# Altium PCB ESC_BOARD.PcbDoc (part 3 of 3)
Units mm, origin at the board's own origin, x right, y up, seen from the top; angles counter-clockwise.
Board outline 80 x 50 mm, 2 copper layers (Top Layer, Bottom Layer); 102 components, 86 nets, 400 pads, 339 vias.
Unrouted connection lines stored in the file: 55.
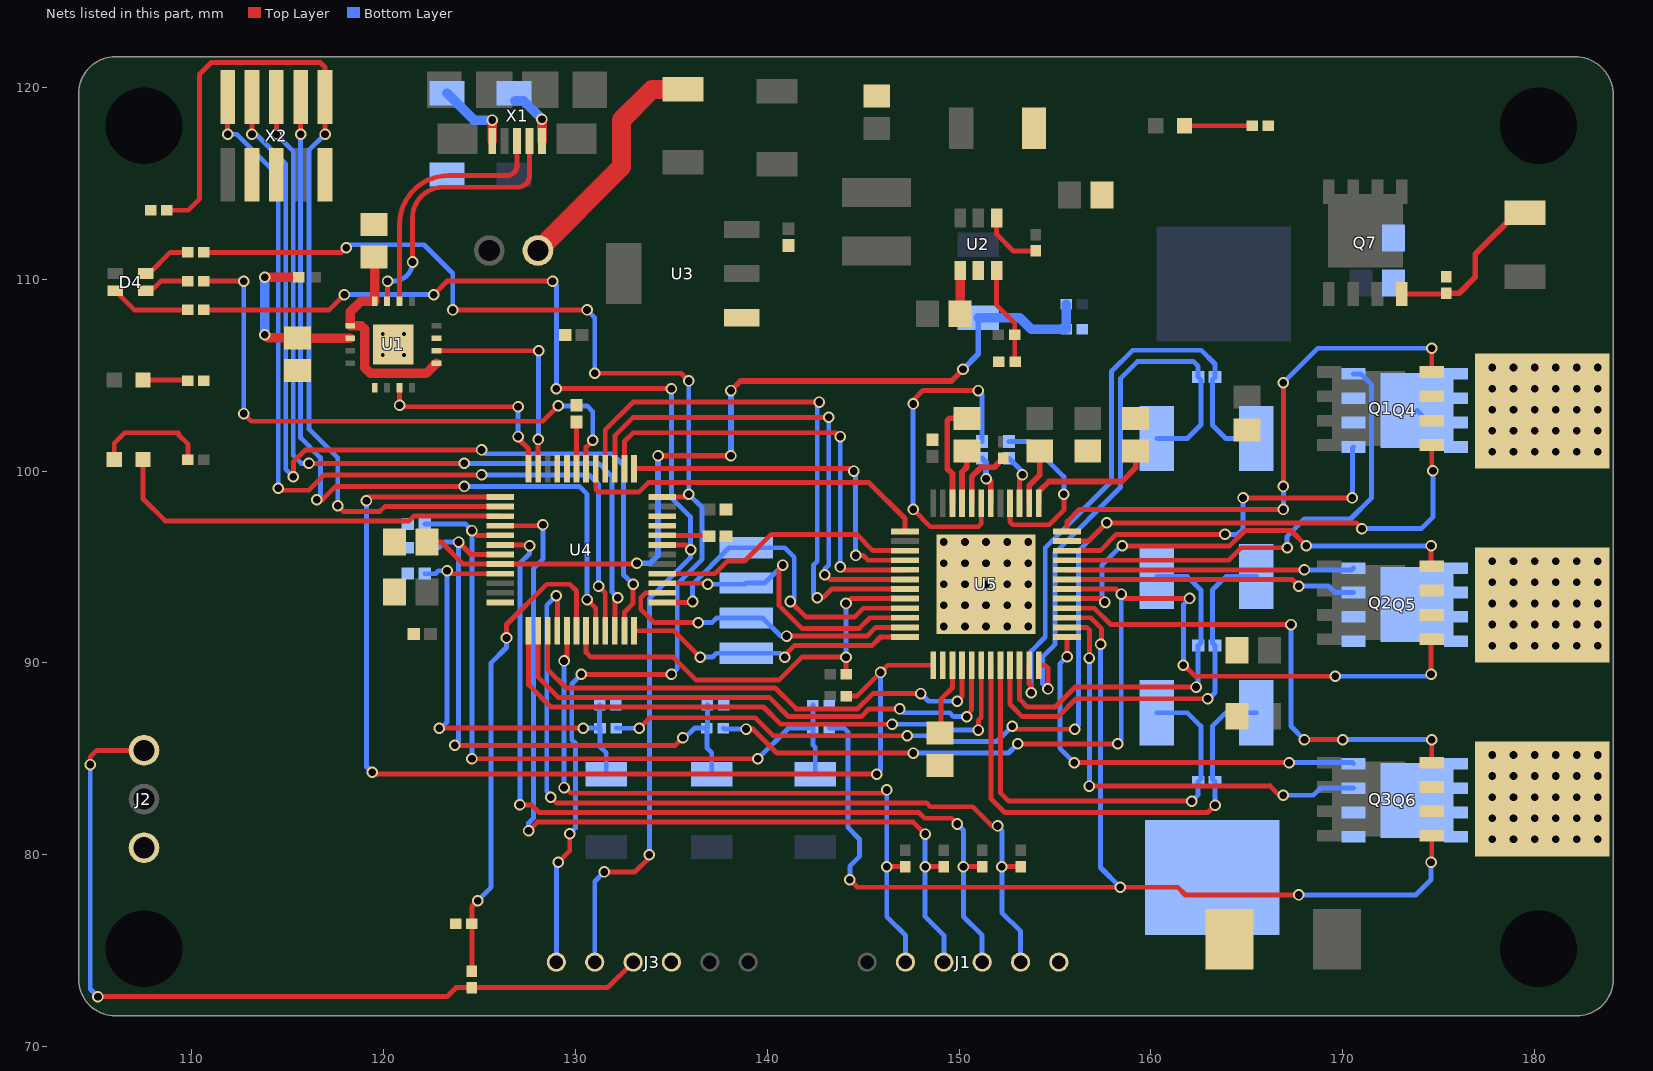
[diagram p2: the nets of this part, all layers, seen from the top]

## Via types
v1: diameter 0.6, hole 0.4, Top Layer to Bottom Layer, 310 vias
v2: diameter 0.7, hole 0.4, Top Layer to Bottom Layer, 25 vias
v3: diameter 0.5, hole 0.2, Top Layer to Bottom Layer, 4 vias

## Nets (pads, with @x,y where several pads share a name; then routed paths per layer and width w, separated by ;. In a path a pad name is that pad's centre, name@x,y a point inside that pad or via, vN(x,y) a via of type N, cw(c..) or ccw(c..) an arc to the next point about the centre after c; other vN are vias at no path point) (continued)
A_LS: U4.28 U5.3 | length 13.9
  Top Layer w0.254: U4.28@134.525,94.65 137.25,94.65 137.908,95.308 138.808,95.308 140.2,96.7 144.65,96.7 145.5,95.85 U5.3@147.175,95.85
ASENSE: C27.2 D8.1 R21.1 R24.2 U4.9 | length 24.6
  Top Layer w0.254: v1(122.9,86.6) v1(130.4,86.6) ; v1(123.3,94.8) 123.45,94.65 U4.9@126.075,94.65
  Bottom Layer w0.254: C27.2@122.14,94.65 122.7,94.65 122.85,94.8 v1(123.3,94.8) 123.3,86.9 123,86.6 v1(122.9,86.6) ; v1(130.4,86.6) R21.1@131.275,86.6 ; R24.2@131.25,87.8 131.25,86.625 R21.1@131.275,86.6 ; D8.1@131.6,84.2 131.6,85.315 131.275,85.64 R21.1@131.275,86.6
B_HS: U4.37 U5.4 | length 18.9
  Top Layer w0.254: U4.37@133.05,100.125 144.375,100.125 v1(144.5,100) 144.625,100 v1@144.5,100.125 ; v1(144.6,95.6) 145,95.6 145.25,95.35 U5.4@147.175,95.35
  Bottom Layer w0.254: v1(144.5,100) 144.6,99.9 v1(144.6,95.6)
B_LS: U4.38 U5.5 | length 23.2
  Top Layer w0.254: U4.38@132.55,100.125 132.55,101.55 133,102 143.6,102 v1(143.8,101.8) ; v1(143.8,95) 143.95,94.85 U5.5@147.175,94.85
  Bottom Layer w0.254: v1(143.8,95) v1(143.8,101.8)
BLUE_LED: J3.2 R12.2 U4.31 | length 65.4
  Top Layer w0.254: R12.2@110.625,108.4 117.15,108.4 v1(117.95,109.2) ; v1(122.6,109.2) 123.3,109.9 v1(128.8,109.9) ; v1(129,104.3) v1(135,104.3) ; v1(131.5,79.1) 133.1,79.1 133.85,79.85 v1(133.85,80) ; U4.31@134.525,96.15 135.75,96.15 v1(136,95.9)
  Bottom Layer w0.254: v1(117.95,109.2) v1(122.6,109.2) ; v1(128.8,109.9) 129,109.7 v1(129,104.3) ; J3.2@131,74.4 131,78.6 v1(131.5,79.1) ; v1(133.85,80) 133.85,93.35 136,95.5 v1(136,95.9) 136,97.6 135,98.6 v1(135,104.3)
BOOTSTRAP: C3.2 U2.1 | length 2.3
  Top Layer w0.5: C3.2@150.05,108.2 U2.1@150.05,110.45
BSENSE: C28.2 D9.1 R22.1 R25.2 U4.7 | length 32.2
  Top Layer w0.254: v1(123.7,85.7) 135.2,85.7 v1(135.6,86.1) ; v1(123.9,96.3) 124.55,95.65 U4.7@126.075,95.65
  Bottom Layer w0.254: C28.2@122.14,96 122.9,96 123.2,96.3 v1(123.9,96.3) 123.9,85.9 v1(123.7,85.7) ; v1(135.6,86.1) 135.7,86.1 136.2,86.6 R22.1@136.85,86.6 ; R25.2@136.875,87.8 136.875,86.625 R22.1@136.85,86.6 ; D9.1@137.1,84.2 137.1,85.315 136.85,85.565 R22.1@136.85,86.6
C_HS: U4.39 U5.6 | length 25.8
  Top Layer w0.254: U4.39@132.05,100.125 132.05,101.85 133,102.8 v1(143.2,102.8) ; v1(143,94.6) 143.25,94.35 U5.6@147.175,94.35
  Bottom Layer w0.254: v1(143,94.6) 143,94.9 143.2,95.1 v1(143.2,102.8)
C_LS: U4.40 U5.7 | length 29
  Top Layer w0.254: U4.40@131.55,100.125 131.55,102.15 133,103.6 v1(142.7,103.6) ; v1(142.6,93.4) 142.9,93.4 143.35,93.85 U5.7@147.175,93.85
  Bottom Layer w0.254: v1(142.6,93.4) 142.4,93.6 142.4,95.1 142.6,95.3 142.6,103.6 v1(142.7,103.6)
CSENSE: C29.2 D10.1 R23.1 R26.2 U4.5 | length 38.2
  Top Layer w0.254: v1(124.6,85) v1(139.5,85) ; v1(124.6,96.9) 124.85,96.65 U4.5@126.075,96.65
  Bottom Layer w0.254: C29.2@122.14,97.25 124.25,97.25 v1(124.6,96.9) v1(124.6,85) ; v1(139.5,85) 141.1,86.6 R23.1@142.375,86.6 ; R26.2@142.375,87.8 R23.1@142.375,86.6 ; D10.1@142.5,84.2 142.5,85.6 142.375,85.725 R23.1@142.375,86.6
CURRENT_SENSE_1: U4.13 U5.18 | length 30.7
  Top Layer w0.254: U4.13@127.55,91.675 127.55,88.85 128.7,87.7 139.8,87.7 140.7,86.8 v1(146.5,86.8) ; v1(151,86.5) 151,87 151.15,87.15 U5.18@151.15,89.875
  Bottom Layer w0.254: v1(146.5,86.8) 148.332,86.8 148.632,86.5 v1(151,86.5)
CURRENT_SENSE_2: U4.14 U5.17 | length 28.7
  Top Layer w0.254: U4.14@128.05,91.675 128.05,89.25 129.1,88.2 140.1,88.2 141.1,87.2 144.9,87.2 145.3,87.6 v1(146.9,87.6) ; v1(150.4,87.2) 150.4,87.3 150.65,87.55 U5.17@150.65,89.875
  Bottom Layer w0.254: v1(146.9,87.6) 147.1,87.4 149.5,87.4 149.7,87.2 v1(150.4,87.2)
CURRENT_SENSE_3: U4.15 U5.16 | length 26.7
  Top Layer w0.254: U4.15@128.55,91.675 128.55,89.65 129.5,88.7 140.4,88.7 141.5,87.6 144.7,87.6 145.5,88.4 v1(148,88.4) ; v1(149.9,88) 150.15,88.25 U5.16@150.15,89.875
  Bottom Layer w0.254: v1(148,88.4) 148.4,88 v1(149.9,88)
ERROR: D7.2 U4.3 | length 21.3
  Top Layer w0.254: D7.2@107.45,100.6 107.45,98.55 108.6,97.4 121.325,97.4 121.575,97.65 U4.3@126.075,97.65
FB: R7.1 R9.2 U2.3 | length 5.2
  Top Layer w0.254: U2.3@151.95,110.45 151.95,108.65 152.9,107.7 R7.1@152.9,107.1 152.9,105.725 R9.2@152.925,105.7
GATE_EN: U4.41 U5.1 | length 18.9
  Top Layer w0.254: U4.41@131.05,100.125 131.05,99.05 131.2,98.9 133.3,98.9 133.8,99.4 145.3,99.4 147.175,97.525 U5.1@147.175,96.85
GH_A: Q1.1 U5.36 | length 28.4
  Top Layer w0.254: U5.36@155.625,96.85 155.625,97.365 156.26,98 v1(166.9,98) ; v1(166.9,99.2) v1(166.9,104.6) ; Q1.1@174.64,105.17 v1(174.64,106.4)
  Bottom Layer w0.254: v1(166.9,98) v1(166.9,99.2) ; v1(166.9,104.6) 168.7,106.4 v1(174.64,106.4)
GH_B: Q2.1 U5.29 | length 23.9
  Top Layer w0.254: U5.29@155.625,93.35 157.49,93.35 157.67,93.17 v1(157.59,93.17) ; v1(158.5,96.1) 164.1,96.1 164.9,96.9 167.3,96.9 v1(168.1,96.1) ; v1(174.6,96.1) 174.6,95.28 174.36,95.04 Q2.1@174.64,95.04
  Bottom Layer w0.254: v1(157.59,93.17) 157.45,93.31 157.45,95.11 158.47,96.13 v1(158.5,96.1) ; v1(168.1,96.1) v1(174.6,96.1)
GH_C: Q3.1 U5.28 | length 26.2
  Top Layer w0.254: U5.28@155.625,92.85 157.05,92.85 157.9,92 v1(167.3,92) ; v1(168,86) v1(170,86) ; Q3.1@174.64,84.8 v1(174.64,86)
  Bottom Layer w0.254: v1(167.3,92) 167.3,86.7 v1(168,86) ; v1(170,86) v1(174.64,86)
GL_A: Q4.1 U5.33 | length 24.6
  Top Layer w0.254: U5.33@155.625,95.35 164.05,95.35 164.7,96 v1(167.1,96)
  Bottom Layer w0.254: v1(167.1,96) 167.1,96.6 168,97.5 170.4,97.5 171.5,98.6 171.5,104.5 170.93,105.07 Q4.1@170.56,105.07
GL_B: Q5.1 U5.32 | length 15
  Top Layer w0.254: U5.32@155.625,94.85 v1(168,94.85)
  Bottom Layer w0.254: v1(168,94.85) 170.47,94.85 Q5.1@170.56,94.94
GL_C: Q6.1 U5.25 | length 21.6
  Top Layer w0.254: v1(155.625,90.325) U5.25@155.625,91.35 ; v1(156,84.8) v1(167.2,84.8)
  Bottom Layer w0.254: v1(155.625,90.325) 155.25,89.95 155.25,85.55 v1(156,84.8) ; v1(167.2,84.8) 170.5,84.8 Q6.1@170.56,84.74
GND: C1.1 C2.1 C4.1 C5.1 C6.1 C7.1 C8.1 C9.1 C10.1 C11.2 C12.2 C15.1 C17.1 C18.1 C19.1 C20.1 C22.1 C23.1 C24.1 C25.1 C26.1 C27.1 C28.1 C29.1 C32.1 C33.1 C34.1 D2.1 D13.2 FB2.2 J1.6 J2.3 J3.4 pad.1@163.2,78.8 R8.2 R9.1 R16.1 R18.1 R19.1 R20.1 R24.1 R25.1 R26.1 R28.1 R29.2 R30.1 R32.1 U1.3 U1.13 U1.17 U2.2 U3.1 U4.12 U4.33 U4.34 U4.44 U4.45 U5.14 U5.20 U5.22 U5.24 U5.49 X2.3 X2.5 X2.9 | length 72.6
  Top Layer w0.254: U5.20@152.15,89.875 152.15,83.23 152.59,82.79 v1(162.13,82.79) ; U5.22@153.15,89.875 153.15,88.1 153.55,87.7 155,87.7 156.04,88.74 v1(162.35,88.74) ; U5.24@154.15,89.875 154.485,89.875 154.63,89.73 v1(154.63,88.64)
  Bottom Layer w0.254: v1(154.63,88.64) 154.35,88.92 154.35,90.33 155,90.98 155,95.75 158.42,99.17 158.42,104.84 159.3,105.72 162.2,105.72 162.46,105.46 C23.1@162.46,104.9 162.6,104.76 162.6,102.4 161.9,101.7 R18.1@160.3,101.7 ; R20.1@160.3,87.4 161.9,87.4 162.6,86.7 162.6,83.94 C25.1@162.46,83.8 162.46,83.12 v1(162.13,82.79) ; R19.1@160.3,94.5 161.9,94.5 162.6,93.8 C24.1@162.6,91.14 ; v1(162.35,88.74) 162.46,88.85 C24.1@162.46,90.9 C24.1@162.6,91.04
  other v2: 149.2,91.9 150.3,91.9 151.4,91.9 152.5,91.9 153.6,91.9 149.2,93 150.3,93 151.4,93 152.5,93 153.6,93 149.2,94.1 150.3,94.1 151.4,94.1 152.5,94.1 153.6,94.1 149.2,95.2 150.3,95.2 151.4,95.2 152.5,95.2 153.6,95.2 149.2,96.3 150.3,96.3 151.4,96.3 152.5,96.3 153.6,96.3
  other v3: 119.95,106.05 121.05,106.05 119.95,107.15 121.05,107.15
GREEN_LED: J3.1 R10.2 U4.36 | length 69.3
  Top Layer w0.254: R10.2@110.625,111.4 117.8,111.4 v1(118.05,111.65) ; v1(123.6,108.4) v1(130.6,108.4) ; v1(129.1,79.6) 129.7,80.2 v1(129.7,81.1) ; v1(130.3,89.4) v1(135,89.4) ; v1(131,105.1) 135.5,105.1 v1(135.9,104.7) ; U4.36@134.525,98.65 135.75,98.65 v1(135.9,98.8)
  Bottom Layer w0.254: v1(118.05,111.65) 118.2,111.8 122.1,111.8 123.6,110.3 v1(123.6,108.4) ; J3.1@129,74.4 129,79.5 v1(129.1,79.6) ; v1(129.7,81.1) 130,81.4 130,85.8 129.8,86 129.8,88.9 v1(130.3,89.4) ; v1(130.6,108.4) 131,108 v1(131,105.1) ; v1(135,89.4) 135.3,89.7 135.3,94.1 136.6,95.4 136.6,98.1 v1(135.9,98.8) v1(135.9,104.7)
HALL_1: J1.3 R2.1 U4.4 | length 47.7
  Top Layer w0.254: U4.4@126.075,97.15 128.25,97.15 v1(128.3,97.2) ; v1(127.55,81.25) 128,81.7 147.6,81.7 v1(148.225,81.075) ; v1(148.225,79.375) R2.1@149.2,79.375
  Bottom Layer w0.254: v1(127.55,81.25) 127.55,81.65 127.8,81.9 127.8,94.9 128.3,95.4 v1(128.3,97.2) ; v1(148.225,81.075) v1(148.225,79.375) 148.225,76.775 149.2,75.8 J1.3@149.2,74.4
HALL_2: J1.4 R3.1 U4.6 | length 47.2
  Top Layer w0.254: U4.6@126.075,96.15 127.55,96.15 v1(127.6,96.1) ; v1(127.1,82.6) 127.7,82.6 128.1,82.2 147.9,82.2 148.2,81.9 149.6,81.9 v1(149.9,81.6) ; v1(150.225,79.375) R3.1@151.2,79.375
  Bottom Layer w0.254: v1(127.1,82.6) 127.1,95.2 127.6,95.7 v1(127.6,96.1) ; v1(149.9,81.6) 150.225,81.275 v1(150.225,79.375) 150.225,76.775 151.2,75.8 J1.4@151.2,74.4
HALL_3: J1.5 R4.1 U4.16 | length 45.1
  Top Layer w0.254: v1(128.7,83) 129,82.7 148.3,82.7 148.5,82.5 150.7,82.5 151.7,81.5 v1(152,81.5) ; v1(129,93.5) 129.05,93.45 U4.16@129.05,91.675 ; v1(152.225,79.375) R4.1@153.2,79.375
  Bottom Layer w0.254: v1@128.75,83.05 128.5,83.3 128.5,93 v1(129,93.5) ; v1(152,81.5) 152.225,81.275 v1(152.225,79.375) 152.225,76.975 153.2,76 J1.5@153.2,74.4
MOTOR_TEMP: J1.2 R1.1 U4.17 | length 35.6
  Top Layer w0.254: v1(129.4,83.5) 129.8,83.2 146.05,83.2 v1(146.225,83.375) ; v1(129.4,90.1) 129.55,90.15 U4.17@129.55,91.675 ; v1(146.225,79.375) R1.1@147.2,79.375
  Bottom Layer w0.254: v1(129.4,83.5) v1(129.4,90.1) ; v1(146.225,83.375) v1(146.225,79.375) 146.225,76.775 147.2,75.8 J1.2@147.2,74.4
NetC11_1: C11.1 U4.32 | length 2.4
  Top Layer w0.254: U4.32@134.525,96.65 C11.1@136.96,96.65
NetC12_1: C12.1 U4.43 | length 2.4
  Top Layer w0.254: U4.43@130.05,100.125 C12.1@130.05,102.56
NetC13_1: C13.1 U5.43 | length 17.1
  Top Layer w0.254: v1(147.6,98) 148.5,97.1 151,97.1 151.15,97.25 U5.43@151.15,98.325 ; v1(147.6,103.5) 147.6,103.7 148.1,104.2 v1(151,104.2)
  Bottom Layer w0.254: v1(147.6,98) v1(147.6,103.5) ; v1(151,104.2) 151.2,104 C13.1@151.2,101.54
NetC13_2: C13.2 U5.42 | length 2.3
  Top Layer w0.3: U5.42@151.65,98.325 v1@151.65,99.45
  Bottom Layer w0.3: C13.2@151.2,100.66 151.4,100.46 v1(151.4,99.6)
NetC14_1: C14.1 U5.40 | length 9.5
  Top Layer w0.254: U5.40@152.65,98.325 152.65,97.35 152.8,97.2 154.7,97.2 155.46,97.96 v1(155.46,98.79)
  Bottom Layer w0.254: C14.1@152.6,101.54 153.63,101.54 155.46,99.71 v1(155.46,98.79)
NetC14_2: C14.2 U5.39 | length 2.7
  Top Layer w0.254: U5.39@153.15,98.325 153.15,99.65 v1(153.3,99.8)
  Bottom Layer w0.254: C14.2@152.6,100.66 153.3,99.96 v1(153.3,99.8)
NetC16_1: C16.1 U5.45 | length 2.8
  Top Layer w0.3: U5.45@150.15,98.325 150.15,99.95 150.4,100.2 C16.1@150.4,101.05
NetC16_2: C16.2 U5.46 | length 5.5
  Top Layer w0.3: U5.46@149.65,98.325 149.65,99.856 149.384,100.122 149.384,102.634 149.5,102.75 C16.2@150.4,102.75
NetC21_1: C21.1 U5.38 | length 3
  Top Layer w0.3: U5.38@153.65,98.325 153.65,99.25 154.2,99.8 C21.1@154.2,101.05
NetC22_2: C22.2 U5.37 | length 7
  Top Layer w0.3: U5.37@154.15,98.325 154.15,98.93 154.68,99.46 158.482,99.46 159.2,100.178 C22.2@159.2,101.05
NetC26_2: C26.2 U5.15 | length 3.8
  Top Layer w0.254: C26.2@149.05,86.35 149.05,88.1 149.65,88.7 U5.15@149.65,89.875
NetD1_2: D1.2 R29.1 | length 3.5
  Top Layer w0.254: D1.2@161.75,118 R29.1@165.275,118
NetD3_2: D3.2 R8.1 | length 2.3
  Top Layer w0.254: D3.2@107.45,104.75 109.725,104.75 R8.1@109.775,104.7
NetD4_1: D4.1 R10.1 | length 2.5
  Top Layer w0.254: D4.1@107.775,110.3 108.875,111.4 R10.1@109.775,111.4
NetD4_2: D4.2 R11.1 | length 2.1
  Top Layer w0.254: D4.2@107.875,109.4 108.375,109.9 R11.1@109.775,109.9
NetD4_3: D4.3 R12.1 | length 4.2
  Top Layer w0.254: D4.3@106,109.4 107,108.4 R12.1@109.775,108.4
NetD6_1: D6.1 JP1.2 | length 12.5
  Top Layer w1: JP1.2@128.04,111.5 132.4,115.86 132.4,118.3 134,119.9 D6.1@135.6,119.9
NetD7_1: D7.1 R31.1 | length 6
  Top Layer w0.254: D7.1@105.95,100.6 105.95,101.45 106.5,102 109.3,102 109.3,101.9 109.8,101.4 R31.1@109.8,100.6
NetD12_2: D12.2 Q7.1 R32.2 | length 8.9
  Top Layer w0.254: Q7.1@173.078,109.229 175.446,109.229 R32.2@175.475,109.2
  Top Layer w0.3: R32.2@175.4,109.275 176.075,109.275 176.9,110.1 176.9,111.3 179.065,113.465 D12.2@179.5,113.465
NetR17_1: R17.1 U5.44 | length 3.4
  Top Layer w0.3: U5.44@150.65,98.325 150.65,99.7 151.15,100.2 151.825,100.2 R17.1@152.3,100.675
nFAULT: R14.1 U4.19 U5.8 | length 22.7
  Top Layer w0.254: U4.19@130.55,91.675 130.55,90.55 130.8,90.3 135.1,90.3 136.3,89.1 140.6,89.1 141.8,90.3 v1(144.1,90.3) R14.1@144.1,89.4 ; v1(144.1,93.1) 144.35,93.35 U5.8@147.175,93.35
  Bottom Layer w0.254: v1(144.1,90.3) v1(144.1,93.1)
nRESET: R30.2 U4.2 X2.10 | length 47.9
  Top Layer w0.254: R30.2@108.7,113.6 109.8,113.6 110.4,114.2 110.4,120.7 111,121.3 116.7,121.3 116.94,121.06 X2.10@116.94,119.5 v1(116.94,117.56) ; v1(117.6,98.2) 117.9,97.9 119.8,97.9 120.05,98.15 U4.2@126.075,98.15
  Bottom Layer w0.254: v1(116.94,117.56) 116.1,116.72 116.1,102.2 117.6,100.7 v1(117.6,98.2)
POWER_GOOD: R13.1 U4.1 U5.13 | length 58.4
  Top Layer w0.254: v1(119.1,98.45) 119.1,98.6 119.15,98.65 U4.1@126.075,98.65 ; v1(119.4,84.3) 119.5,84.2 v1(145.7,84.2) ; R13.1@144.125,88.1 144.295,88.27 144.67,88.27 146.275,89.875 U5.13@148.65,89.875
  Bottom Layer w0.254: v1(119.1,98.45) 119.1,84.6 v1(119.4,84.3) ; v1(145.7,84.2) 145.9,84.4 v1(145.9,89.5)
RED_LED: R11.2 U4.42 | length 30.9
  Top Layer w0.254: R11.2@110.625,109.9 v1(112.7,109.9) ; v1(112.7,103) 113.1,102.6 128.3,102.6 v1(129.1,103.4) ; U4.42@130.55,100.125 130.55,101.25 v1(130.9,101.6)
  Bottom Layer w0.254: v1(112.7,103) v1(112.7,109.9) ; v1(129.1,103.4) 130.6,103.4 130.9,103.1 v1(130.9,101.6)
SH_A: pad.1@180.4,103.138 Q1.3 Q4.2 R21.2 U5.35 | length 60.6
  Top Layer w0.254: v1(133.32,86.59) 133.87,87.14 139.36,87.14 140.3,86.2 v1(147.3,86.2) ; v1(152.76,86.7) 152.92,86.54 v1(156.03,86.54) ; U5.35@155.625,96.35 156.74,96.35 v1(157.69,97.3) 170.7,97.3 v1(171,97) ; Q1.3@174.64,101.36 174.64,100.177 174.7,100.117 v1(174.7,100.009)
  Bottom Layer w0.254: R21.2@132.125,86.6 132.135,86.59 v1(133.32,86.59) ; v1(147.3,86.2) 148.3,86.2 148.6,85.9 151.96,85.9 v1(152.76,86.7) ; v1(156.03,86.54) 156.23,86.74 156.23,95.84 v1(157.69,97.3) ; v1(171,97) 174.1,97 174.7,97.6 v1(174.7,100.009) ; Q4.2@173.862,103.165 Q4.2@174.2,102.827
  other v1: 177.8,101 178.9,101 180,101 181.1,101 182.2,101 183.3,101 177.8,102.1 178.9,102.1 180,102.1 181.1,102.1 182.2,102.1 183.3,102.1 177.8,103.2 178.9,103.2 180,103.2 181.1,103.2 182.2,103.2 183.3,103.2 177.8,104.3 178.9,104.3 180,104.3 181.1,104.3 182.2,104.3 183.3,104.3 177.8,105.4 178.9,105.4 180,105.4 181.1,105.4 182.2,105.4 183.3,105.4
SH_B: pad.2@180.4,93.008 Q2.3 Q5.2 R22.2 U5.30 | length 54.4
  Top Layer w0.254: v1(138.89,86.55) 139.25,86.55 140.5,85.3 v1(147.6,85.3) ; v1(153.05,85.78) v1(158.27,85.78) ; U5.30@155.625,93.85 158.17,93.85 158.66,93.36 v1(162.01,93.36) ; v1(161.69,89.88) 161.72,89.88 162.3,89.3 v1(169.6,89.3) ; v1(174.6,89.4) 174.6,91.19 Q2.3@174.64,91.23
  Bottom Layer w0.254: R22.2@137.7,86.6 137.75,86.55 v1(138.89,86.55) ; v1(147.6,85.3) 152.57,85.3 v1(153.05,85.78) ; v1(158.27,85.78) 158.45,85.96 v1(158.45,93.59) ; v1(161.69,89.88) 161.69,93.04 v1(162.01,93.36) ; v1(169.6,89.3) 174.5,89.3 v1(174.6,89.4)
  other v1: 177.8,90.9 178.9,90.9 180,90.9 181.1,90.9 182.2,90.9 183.3,90.9 177.8,92 178.9,92 180,92 181.1,92 182.2,92 183.3,92 177.8,93.1 178.9,93.1 180,93.1 181.1,93.1 182.2,93.1 183.3,93.1 177.8,94.2 178.9,94.2 180,94.2 181.1,94.2 182.2,94.2 183.3,94.2 177.8,95.3 178.9,95.3 180,95.3 181.1,95.3 182.2,95.3 183.3,95.3
SH_C: pad.3 Q3.3 Q6.2 R23.2 U5.27 | length 58.8
  Top Layer w0.254: v1(144.3,78.7) 144.7,78.3 v1(158.4,78.3) 161.4,78.3 161.8,77.9 v1(167.7,77.9) ; U5.27@155.625,92.35 156.86,92.35 157.43,91.78 157.43,91.03 v1(157.37,90.97) ; Q3.3@174.27,83.53 Q3.3@174.64,83.53 ; v1(174.6,79.6) 174.6,79.8 174.64,79.84 Q3.3@174.64,80.99
  Bottom Layer w0.254: R23.2@143.225,86.6 144,86.6 144.2,86.4 144.2,81.42 144.8,80.82 144.8,79.9 144.3,79.4 v1(144.3,78.7) ; v1(157.37,90.97) 157.37,79.33 v1(158.4,78.3) ; v1(167.7,77.9) 173.8,77.9 174.6,78.7 v1(174.6,79.6)
  other v1: 177.8,80.8 178.9,80.8 180,80.8 181.1,80.8 182.2,80.8 183.3,80.8 177.8,81.9 178.9,81.9 180,81.9 181.1,81.9 182.2,81.9 183.3,81.9 177.8,83 178.9,83 180,83 181.1,83 182.2,83 183.3,83 177.8,84.1 178.9,84.1 180,84.1 181.1,84.1 182.2,84.1 183.3,84.1 177.8,85.2 178.9,85.2 180,85.2 181.1,85.2 182.2,85.2 183.3,85.2
SHDN_N: R6.1 U2.4 | length 3.3
  Top Layer w0.254: U2.4@151.95,113.2 151.95,112.35 152.825,111.475 R6.1@154,111.475
SL_A: C23.2 Q4.3 R18.2 U5.23 U5.34 | length 51.6
  Top Layer w0.254: U5.23@153.65,89.875 153.65,88.92 153.75,88.82 v1(153.75,88.441) ; U5.34@155.625,95.85 157.35,95.85 158.2,96.7 v1(163.859,96.7) ; v1(164.8,98.6) v1(170.5,98.6)
  Bottom Layer w0.254: v1(153.75,88.441) 153.75,90.61 154.49,91.35 154.49,96.01 157.94,99.46 157.94,105.2 159.04,106.3 162.62,106.3 163.34,105.58 C23.2@163.34,104.9 163.2,104.76 163.2,102.4 163.9,101.7 R18.2@165.5,101.7 ; v1(163.859,96.7) 164.5,96.7 164.8,97 v1(164.8,98.6) ; v1(170.5,98.6) 170.5,101.2 Q4.3@170.56,101.26
SL_B: C24.2 Q5.3 R19.2 U5.21 U5.31 | length 36.8
  Top Layer w0.254: U5.21@152.65,89.875 152.65,87.84 153.29,87.2 155.16,87.2 156.09,88.13 v1(162.95,88.13) ; U5.31@155.625,94.35 167.35,94.35 v1(167.7,94)
  Bottom Layer w0.254: v1(162.95,88.13) 162.95,88.05 163.34,88.44 C24.2@163.34,90.9 163.2,91.04 163.2,93.8 163.9,94.5 R19.2@165.5,94.5 ; v1(167.7,94) 169.271,94 169.601,93.67 Q5.3@170.56,93.67
SL_C: C25.2 Q6.3 R20.2 U5.19 U5.26 | length 49.6
  Top Layer w0.254: U5.19@151.65,89.875 151.65,82.93 152.38,82.2 162.96,82.2 v1(163.34,82.58) ; U5.26@155.625,91.85 156.65,91.85 156.79,91.71 v1(156.79,90.25) ; v1(156.79,83.58) 166.18,83.58 166.2,83.6 166.8,83 v1(166.9,83.1)
  Bottom Layer w0.254: v1@156.79,83.42 v1(156.79,83.58) v1(156.79,90.25) ; v1(163.34,82.58) C25.2@163.34,83.8 163.2,83.94 163.2,86.7 163.9,87.4 R20.2@165.5,87.4 ; v1(166.9,83.1) 168.47,83.1 168.84,83.47 Q6.3@170.56,83.47
SPI_CS_N: CS.1 U4.25 U5.9 | length 17.6
  Top Layer w0.254: U4.25@134.525,93.15 136.05,93.15 v1(136.1,93.2) ; v1(141.2,93.2) 142,92.4 144.55,92.4 145,92.85 U5.9@147.175,92.85
  Bottom Layer w0.254: v1(136.1,93.2) 136.1,94.1 138,96 CS.1@138.9,96 140.9,96 141.4,95.5 v1@141.4,93.2
SPI_MISO: SCK.1 U4.26 U5.11 | length 16.6
  Top Layer w0.254: U4.26@134.525,93.65 133.65,93.65 133.4,93.4 133.4,92.8 134.1,92.1 v1(136.4,92.1) ; v1(141,91.4) 145.2,91.4 145.65,91.85 U5.11@147.175,91.85
  Bottom Layer w0.254: v1(136.4,92.1) 137.104,92.1 137.338,92.333 SCK.1@138.9,92.333 139.767,92.333 140.7,91.4 v1(141,91.4)
SPI_MOSI: MOSI.1 U4.27 U5.10 | length 16.2
  Top Layer w0.254: U4.27@134.525,94.15 136.85,94.15 v1(136.9,94.1) ; v1(140.8,95.1) 140.6,94.9 140.6,93 141.8,91.8 144.8,91.8 145.35,92.35 U5.10@147.175,92.35
  Bottom Layer w0.254: v1(136.9,94.1) 138.833,94.1 MOSI.1@138.9,94.167 139.867,94.167 v1(140.8,95.1)
SPI_SCK: MISO.1 U4.24 U5.12 | length 15.4
  Top Layer w0.254: U4.24@133.05,91.675 135.125,91.675 v1(136.5,90.3) ; v1(140.9,90.3) 140.9,90.4 141.4,90.9 145.45,90.9 145.9,91.35 U5.12@147.175,91.35
  Bottom Layer w0.254: v1(136.5,90.3) 137.138,90.3 137.338,90.5 MISO.1@138.9,90.5 140.7,90.5 v1(140.9,90.3)
TCK: U4.23 X2.4 | length 48.4
  Top Layer w0.254: v1(113.13,117.56) X2.4@113.13,119.5 ; v1(115.29,99.7) 115.29,100.49 115.9,101.1 v1(125.1,101.1) ; U4.23@132.55,91.675 132.55,92.65 133,93.1 v1(133,94.1)
  Bottom Layer w0.254: v1(113.13,117.56) 113.34,117.56 114.89,116.01 114.89,100.1 v1(115.29,99.7) ; v1(125.1,101.1) 125.3,100.9 131.9,100.9 132.5,100.3 132.5,94.6 v1(133,94.1)
TDI: U4.20 X2.8 | length 43.4
  Top Layer w0.254: v1(115.67,117.56) X2.8@115.67,119.5 ; v1(116.5,98.5) 116.8,98.5 117.5,99.2 v1(124.2,99.2) ; v1(130.6,93.3) 131.05,92.85 U4.20@131.05,91.675
  Bottom Layer w0.254: v1(115.67,117.56) 115.67,101.73 116.7,100.7 116.7,98.7 v1(116.5,98.5) ; v1(124.2,99.2) 130.2,99.2 130.6,98.8 v1(130.6,93.3)
TDO: U4.22 X2.6 | length 44.3
  Top Layer w0.254: v1(114.4,117.56) X2.6@114.4,119.5 ; v1(116.1,100.4) v1(124.2,100.4) ; U4.22@132.05,91.675 132.05,93.25 v1(132.2,93.4)
  Bottom Layer w0.254: v1(114.4,117.56) 115.28,116.68 115.28,100.82 115.7,100.4 v1(116.1,100.4) ; v1(124.2,100.4) 131.2,100.4 131.9,99.7 131.9,93.7 v1(132.2,93.4)
THROTTLE_3V3: R15.1 R16.2 U4.18 | length 25.6
  Top Layer w0.254: R15.1@124.6,73.925 R16.2@124.6,76.4 124.6,77.3 v1(124.9,77.6) ; v1(126.4,91.3) 126.4,92 128.5,94.1 129.7,94.1 130.05,93.75 U4.18@130.05,91.675
  Bottom Layer w0.254: v1(124.9,77.6) 125.6,78.3 125.6,90 126.4,90.8 v1(126.4,91.3)
THROTTLE_5V: J2.1 J3.3 R15.2 | length 44.3
  Top Layer w0.254: v1(104.7,84.7) 104.7,85.1 105.04,85.44 J2.1@107.5,85.44 ; v1(105.1,72.6) 123.3,72.6 123.775,73.075 R15.2@124.6,73.075 131.675,73.075 J3.3@133,74.4
  Bottom Layer w0.254: v1(104.7,84.7) 104.7,73 v1(105.1,72.6)
TMS: U4.21 X2.2 | length 46.9
  Top Layer w0.254: v1(111.86,117.56) X2.2@111.86,119.5 ; v1(114.5,99.1) 114.5,99 116.1,99 116.9,99.8 v1(125.1,99.8) ; v1(131.2,94) 131.55,93.65 U4.21@131.55,91.675
  Bottom Layer w0.254: v1(111.86,117.56) 112.34,117.56 114.5,115.4 v1(114.5,99.1) ; v1(125.1,99.8) 130.7,99.8 131.2,99.3 v1(131.2,94)
UART_MCU_RX: U1.15 U4.48 | length 10.6
  Top Layer w0.254: U1.15@120.825,104.35 v1(120.825,103.425) 120.9,103.35 v1(127,103.35) ; v1(127,101.8) 127,101.7 127.55,101.15 U4.48@127.55,100.125
  Bottom Layer w0.254: v1(127,101.8) v1(127,103.35)
UART_MCU_TX: U1.2 U4.47 | length 11.5
  Top Layer w0.254: U1.2@122.75,106.275 v1(128.075,106.275) ; U4.47@128.05,100.125 v1(128.05,101.65)
  Bottom Layer w0.254: v1(128.05,101.65) 128.075,101.675 v1(128.075,106.275)
USBDM: U1.7 X1.2 | length 14.4
  Top Layer w0.254: U1.7@120.175,108.85 ccw(c120.175,108.875) 120.2,108.875 v1(120.2,109.9) ; v1(121.5,110.9) 121.5,113.2 cw(c123.1,113.2) 123.1,114.8 127,114.8 ccw(c127,115.4) 127.6,115.4 X1.2@127.6,117.2
  Bottom Layer w0.254: v1(120.2,109.9) 120.5,109.9 ccw(c120.5,110.9) v1(121.5,110.9)
USBDP: U1.6 X1.3 | length 13.1
  Top Layer w0.254: U1.6@120.825,108.85 120.825,112.86 cw(c123.365,112.86) 123.365,115.4 126.4,115.4 ccw(c126.4,115.95) 126.95,115.95 X1.3@126.95,117.2
USBVDD: FB1.1 X1.1 | length 3
  Top Layer w0.5: X1.1@128.25,117.2 v1(128.25,118.35)
  Bottom Layer w0.5: FB1.1@126.82,119.3 127.3,119.3 v1(128.25,118.35)
USBVSS: FB2.1 X1.5 | length 4
  Top Layer w0.5: X1.5@125.65,117.2 v1(125.65,118.3)
  Bottom Layer w0.5: FB2.1@123.3,119.7 124.7,118.3 v1(125.65,118.3)
VBUSSENSE: C34.2 D11.1 R27.1 R28.2 U4.8 | length 46.7
  Top Layer w0.254: C34.2@122.25,96.3 123,96.3 124.15,95.15 U4.8@126.075,95.15 133.15,95.15 v1(133.2,95.2)
  Top Layer w0.3: v1(134.3,100.8) v1(138.1,100.8) ; v1(138.1,104.2) 138.6,104.7 149.6,104.7 v1(150.2,105.3)
  Bottom Layer w0.3: v1@133.4,95.2 133.9,95.2 134.3,95.6 v1(134.3,100.8) ; v1(138.1,100.8) 138.1,104.1 v1@138.2,104.2 ; v1(150.2,105.3) 151,106.1 D11.1@151,108
  Bottom Layer w0.5: D11.1@151,108 153.15,108 153.75,107.4 R28.2@155.575,107.4 R27.1@155.575,108.7
VCC_5V: C1.2 R5.2 U1.10 | length 9.3
  Top Layer w0.254: C1.2@115.5,106.95 C1.2@115.525,106.925
  Top Layer w0.5: v1(113.8,107.1) 113.95,106.95 C1.2@115.5,106.95 ; v1(113.8,110.1) R5.2@115.575,110.1 ; C1.2@115.525,106.925 U1.10@118.25,106.925
  Bottom Layer w0.5: v1(113.8,107.1) v1(113.8,110.1)
VCCIO: C2.2 U1.1 U1.8 U1.9 | length 11.5
  Top Layer w0.254: C2.2@119.5,111.15 C2.2@119.525,111.125
  Top Layer w0.5: C2.2@119.525,111.125 U1.8@119.525,108.85 118.8,108.85 118.25,108.3 U1.9@118.25,107.575 118.825,107.575 119,107.4 119,105.4 119.3,105.1 122.225,105.1 U1.1@122.75,105.625
pads on no net: U1.4 U1.5 U1.11 U1.12 U1.14 U1.16 U4.30 U4.46 U5.47 X1. X1.4 X2.7

## Polygon pours and split planes (outlines as drawn)
+VBUS on Top Layer "VBUS" (solid, remove dead copper, pour order 6): 167.8,73.7 168.3,73.2 171.2,73.2 171.9,73.9 171.9,78.8 172.2,79.1 173.6,80.5 173.6,106.5 172.4,107.7 172.4,110 168.8,110 168.309,109.509 167.8,109
+5V on Top Layer "5V" (solid, remove dead copper, pour order 4): 134.3,117.4 133.9,117 133.9,113.1 134.7,112.3 141.1,112.3 141.275,112.475 142.375,112.475 142.5,112.6 142.5,116.8 141.9,117.4
+5V_BUCK on Top Layer "5V_BUCK" (solid, remove dead copper, pour order 2): 141.5,118.2 143,116.7 143,113.841 143.541,113.3 147.45,113.3 148.05,113.9 148,113.95 148,118.2 147.7,118.5 147.4,118.8 144,118.8 142.3,120.5 141.7,121.1 139.05,121.1 138.53,120.58 138.53,118.72 139.05,118.2
5V_SW on Top Layer "GND" (solid, remove dead copper, pour order 0): 144.069,106.4 148.9,106.4 149.2,106.7 149.2,111.5 150.1,111.5 150.5,111.9 150.5,115.4 151.7,116.6 151.7,119.1 151.3,119.5 148.9,119.5 148.2,118.8 148.2,113.8 147.5,113.1 143.9,113.1 143.3,112.5 143.3,107.056
SH_A on Top Layer "SH_A" (solid, remove dead copper, pour order 16): 174.12,104.58 173.72,104.18 173.72,100.59 174.16,100.15 178.11,100.15 178.63,100.67 178.63,104.17 178.22,104.58
SH_B on Top Layer "SH_B" (solid, remove dead copper, pour order 18): 174.09,94.46 173.69,94.06 173.69,90.47 174.13,90.03 178.08,90.03 178.6,90.55 178.6,94.05 178.19,94.46
SH_C on Top Layer "SH_C" (solid, remove dead copper, pour order 20): 173.953,84.25 173.76,84.057 173.76,80.213 174.073,79.9 178.023,79.9 178.543,80.42 178.543,83.92 178.213,84.25
+VIN on Top Layer "V_IN" (solid, remove dead copper, pour order 22): 161.4,112.6 160.7,111.9 160.7,107.6 161.3,107 166.6,107 167.3,107.7 167.3,109.1 168.6,110.4 173.3,110.4 173.8,110.9 173.8,115.15 173.35,115.6 173.329,115.579 168.5,115.579 168.125,115.204 168.125,113.725 167,112.6
+VBUS on Top Layer "VBUS CAPS" (solid, remove dead copper, pour order 34): 158.9,106.6 158.2,107.3 158.2,111.5 156.6,113.1 156.6,115.3 156.4,115.5 151.2,115.5 150.6,114.9 150.6,112.725 151.425,111.9 155.2,111.9 156,111.1 156,107.1 151.85,102.95 151.85,101.375 152.125,101.1 152.8,101.1 153.25,101.55 153.25,101.7 153.3,101.7 153.5,101.9 157.4,101.9 158.2,102.7 158.2,103.9 159.4,105.1 163.75,105.1 163.85,105 163.85,103.25 163.984,103.116 163.984,103.022 165.608,103.022 165.715,102.915 166.2,103.4 166.2,105 166.3,105.1 168.3,105.1 168.8,105.6 168.8,106.5 168.6,106.6
GND on Bottom Layer "POWER_GND" (solid, remove dead copper, pour order 14): 161.6,85.6 161.6,82.8 162.4,82 165.7,82 167.4,80.3 167.4,76.4 166.5,75.5 160.2,75.5 159.1,76.6 159.1,82.5 159.1,85.6 159.1,103.559 159.541,104 161.132,104 161.6,103.532
SL_B on Bottom Layer "SL_B" (solid, remove dead copper, pour order 12): 171.1,94.3 171.4,94 171.4,90.8 171.2,90.6 169.1,90.6 167.8,91.9 167.8,92.249 167.751,92.249 167.5,92.5 167.468,92.468 164.832,92.468 164.3,93 164.3,96 164.7,96.4 166.4,96.4 166.8,96 166.8,94.8 167.3,94.3 171.1,94.3 171.433,93.967
SL_A on Bottom Layer "SL_A" (solid, remove dead copper, pour order 10): 170.8,104.4 165.168,104.4 164.5,103.732 164.5,99.7 165,99.2 170.7,99.2 171.3,99.8 171.3,104.1
SL_C on Bottom Layer "SL_C" (solid, remove dead copper, pour order 8): 166.384,89.416 164.316,89.416 164,89.1 164,84.347 167.047,81.3 168.56,79.787 170.887,79.787 171.5,80.4 171.5,83.8 171.1,84.2 167.1,84.2 166.7,84.6 166.7,89.1
+VIN on Bottom Layer "VIN" (solid, remove dead copper, pour order 26): 168.4,112.7 169.1,113.4 171.366,113.4 171.8,112.966 171.8,108.7 169.8,106.7 167.2,106.7 166.5,106.7 165.8,107.4 165.8,112.1 166.4,112.7
SH_A on Bottom Layer "SH_A" (solid, remove dead copper, pour order 28): 175.546,106.076 175.1,105.63 175.1,100.646 175.546,100.2 183.3,100.2 183.9,100.8 183.9,105.7 183.5,106.1 177.9,106.1
SH_B on Bottom Layer "SH_B" (solid, remove dead copper, pour order 30): 175.546,95.9 175.1,95.43 175.1,90.446 175.546,90 183.3,90 183.9,90.6 183.9,95.5 183.5,95.9 177.9,95.9
SH_C on Bottom Layer "SH_C" (solid, remove dead copper, pour order 32): 175.8,85.8 175.1,85.33 175.1,80.346 175.546,79.9 183.3,79.9 183.9,80.5 183.9,85.4 183.5,85.8 177.9,85.8

## Silkscreen, mask and mechanical layers (free items; w line width, h text height)
Top Overlay:
  text "VBUS" at 159.4,119.6 h1
  text "5V_USB" at 124.1,108.7 h1
  text "3V3" at 105.4,106.2 h1
  text "ERROR" at 104.8,102 h1
  text "MCU_TX" at 104.5,97.7 h1
  text "MCU_RX" at 104.5,93.7 h1
Bottom Overlay:
  text "POWER" at 167.3,113.8 h1.52
  text "GND" at 166.7,73.5 h1.52